# Altium PCB PCB1.PcbDoc
Units mm, origin at the board's own origin, x right, y up, seen from the top; angles counter-clockwise.
Board outline 54.99 x 25.91 mm, 2 copper layers (Top Layer, Bottom Layer); 43 components, 36 nets, 135 pads, 24 vias.
Unrouted connection lines stored in the file: 2.
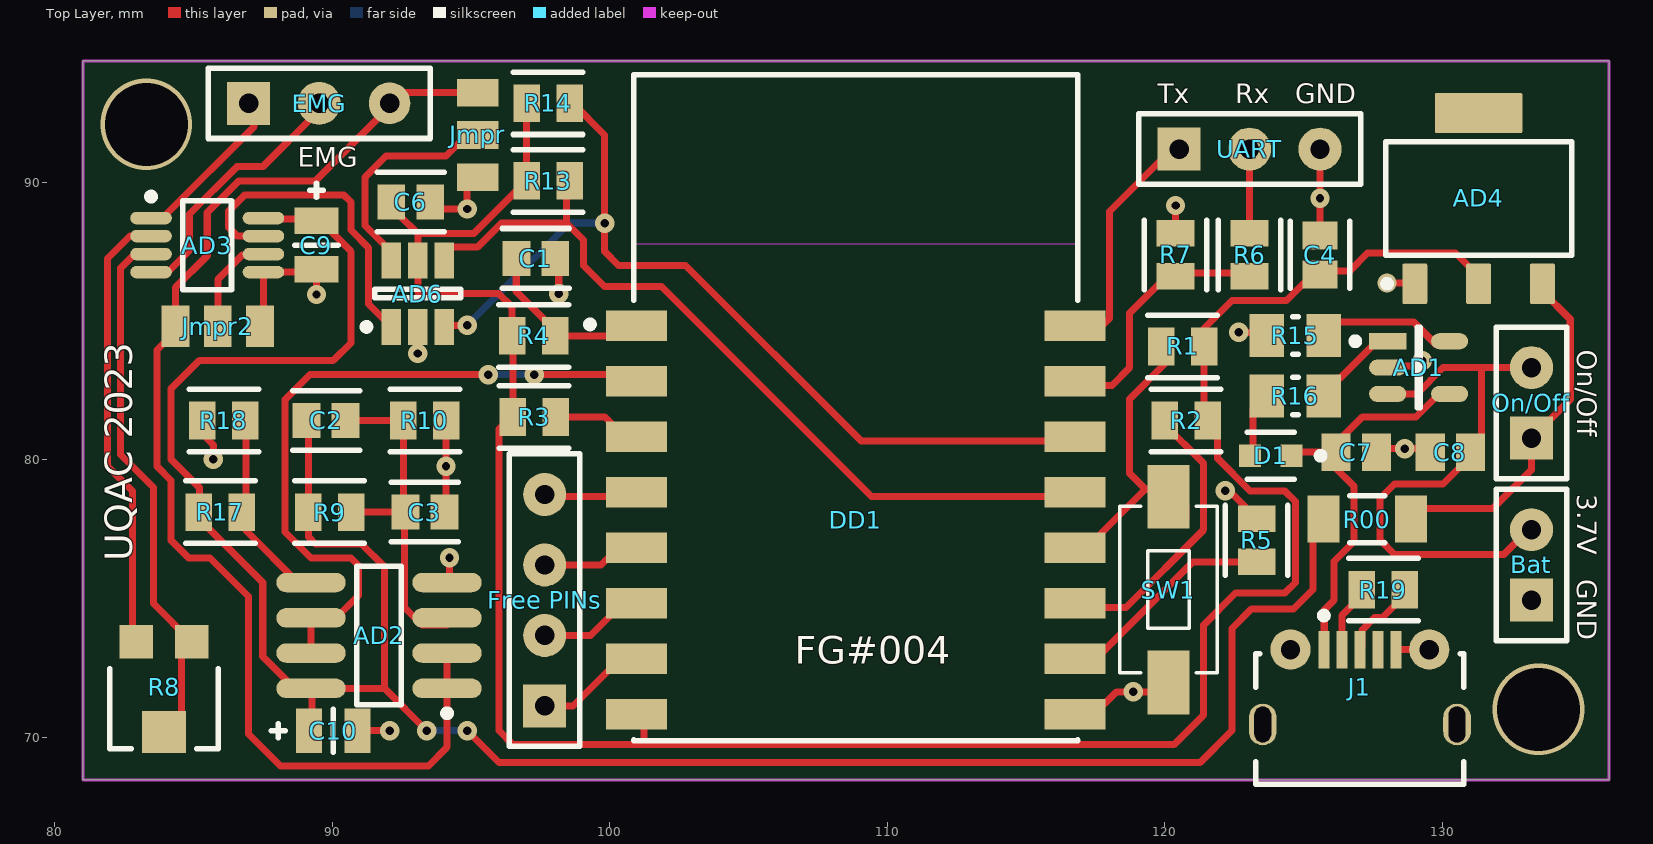
[diagram p0: Top Layer view]
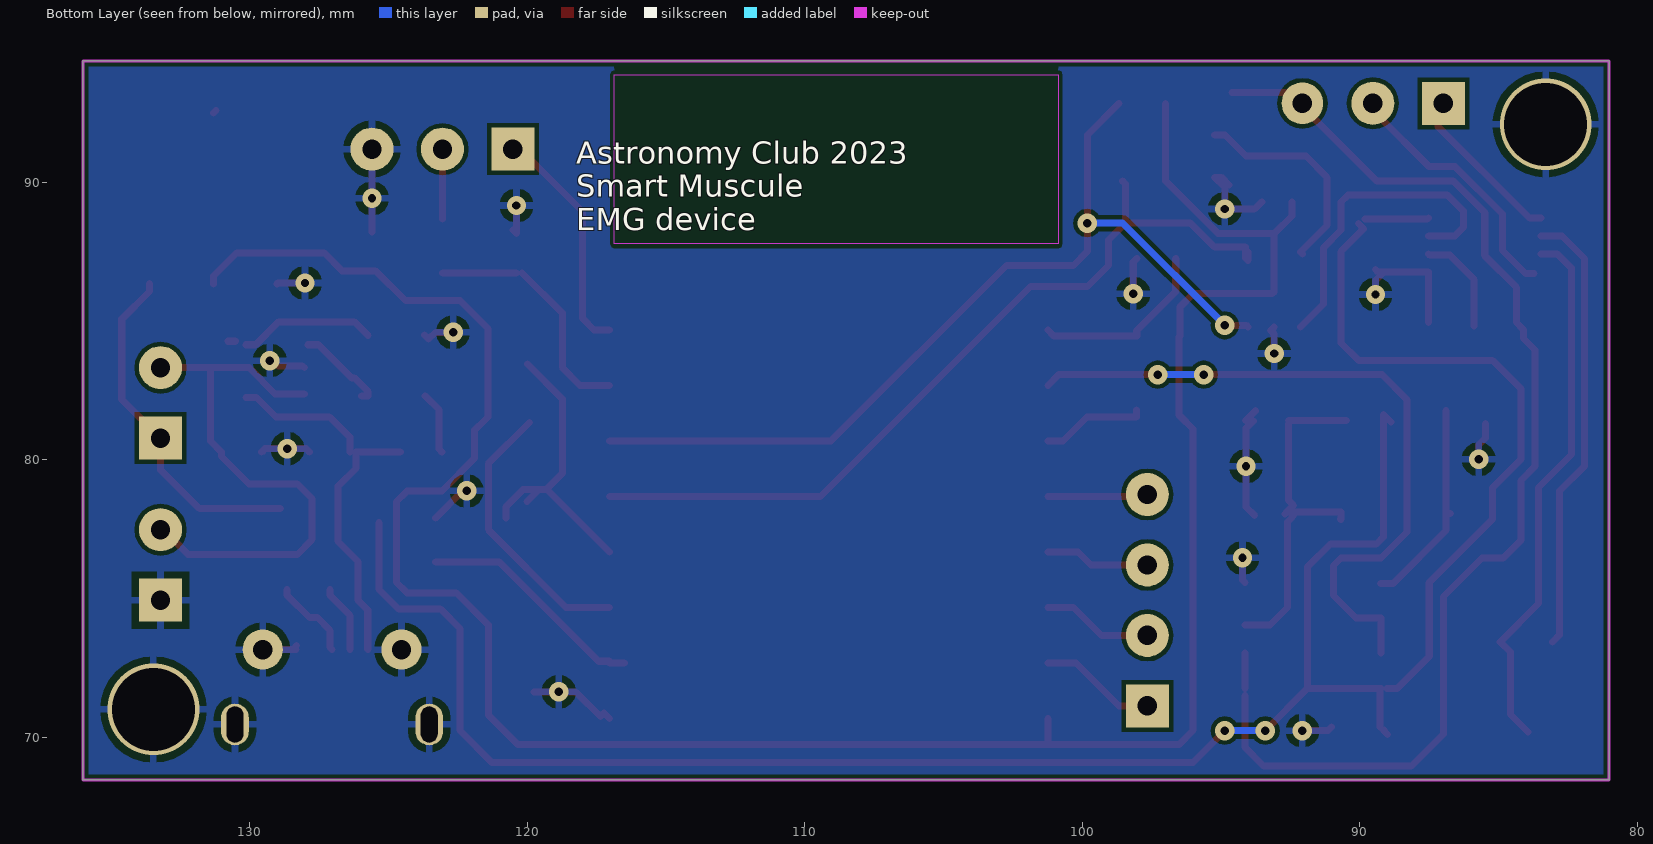
[diagram p1: Bottom Layer view, seen from below]
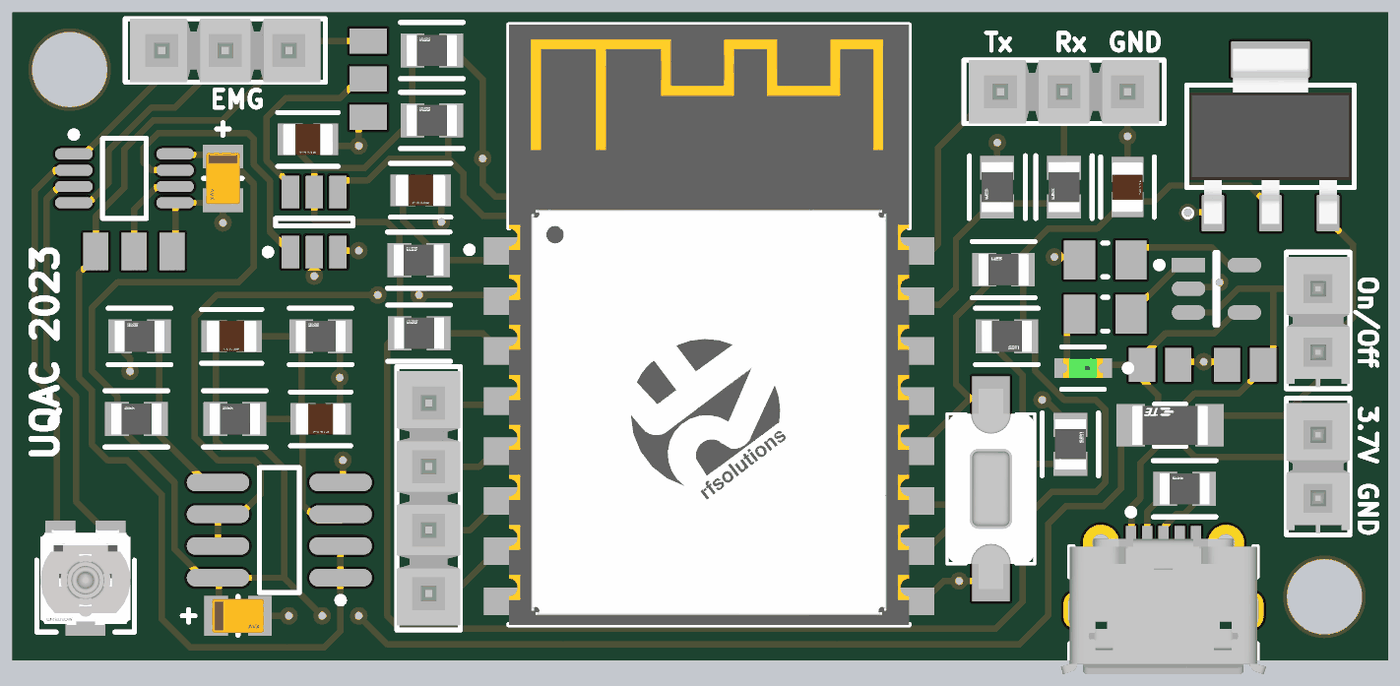
[diagram p2: 3D render of the assembled board from above, using the file's embedded part models]

## Layer stack, top to bottom
Top Solder: solder mask 0.0102, Solder Resist, Dk 3.5
Top Layer: signal copper 0.0356
Dielectric 1: dielectric 0.32, FR-4, Dk 4.8
Bottom Layer: signal copper 0.0356
Bottom Solder: solder mask 0.0102, Solder Resist, Dk 3.5

## Board outline
81.026,68.453 136.017,68.453 136.017,94.361 81.026,94.361

## Design rules (kind name [scope] priority, off if disabled: settings)
Clearance [All] p1: gap=0.152 ignorepadtopadclearanceinfootprint=FALSE
HoleSize [All] p1: absolutevalues=TRUE maxlimit=254 minlimit=0.305 maxpercent=80.000 minpercent=20.000
PolygonConnect [All] p1: connectstyle=Relief reliefconductorwidth=0.254 reliefentries=4 polygonreliefangle="90 Angle" airgapwidth=0.254
RoutingVias [All] p1: holewidth=0.711 width=1.27 viastyle="Through Hole" minholewidth=0.711 minwidth=1.27 maxholewidth=0.711 maxwidth=1.27
SilkToSilkClearance [All] p1: silktosilkclearance=0.025
SilkToSolderMaskClearance [IsPad] p1: minsilkscreentomaskgap=0.025 clearancetoexposedcopper=TRUE
SolderMaskExpansion [All] p1: expansion=0.102
Width [All] p1: maxlimit=0.254 minlimit=0.152 preferedwidth=0.254
27 further rules are at their usual default settings.

## Components (designator, comment, footprint, x,y, rotation, side; value= is the part's Value field where it differs from the comment)
AD1 "MCP73831" FP-C04-091-OT-IPC_B 129.159,83.312 r0 top
AD2 "MCP6002" SOIC-SN8_M 91.694,73.66 r180 top
AD3 "AD8226A" ADI-RM-8_L 85.503,87.725 r0 top
AD4 "LM1117" DCY0004A_L 131.318,89.408 r90 top
AD6 "MCP3421" SOT-23-CH6_M 93.091,85.979 r90 top
Bat "TSW-102-26-G-S" SMTC-TSW-102-26-XX-S 133.223,74.93 r90 top
C1 "0.1uf" FP-0805-L_2_0_0_1-W_1_25-IPC_C 97.342,87.249 r0 top
C2 "10uF" FP-0805-L_2_0_0_1-W_1_25-IPC_C 89.789,81.407 r0 top
C3 "10uF" FP-0805-L_2_0_0_1-W_1_25-IPC_C 93.345,78.105 r0 top
C4 "0.1uf" FP-0805-L_2_0_0_1-W_1_25-IPC_C 125.603,87.376 r90 top
C6 "10uF" FP-0805-L_2_0_0_1-W_1_25-IPC_C 92.837,89.281 r0 top
C7 "4.7uF" CAPC2013X145X50LL20T20 126.91,80.264 r180 top
C8 "4.7uF" CAPC2013X145X50LL20T20 130.302,80.264 r0 top
C9 "22uF" FP-NLJP-MFG 89.44,87.725 r90 top
C10 "22uF" FP-NLJP-MFG 90.043,70.231 r180 top
D1 "LTST-C190GKT" FP-LTST-C190GKT-MFG 123.825,80.137 r180 top
DD1 "ESP-12S" FP-ESP-12S-MFG 108.87,81.868 r0 top
EMG "TSW-103-07-T-S" SMTC-TSW-103-07-X-S#1 86.995,92.837 r0 top
"Free PINs" "TSW-104-08-L-S" SMTC-TSW-104-08-X-S 97.663,71.12 r90 top
J1 "Micro USB" USB-MICRO-B_V 127.04,71.802 r0 top
Jmpr "TSW-103-07-T-S" SMTC-TSW-103-07-X-S#2 95.25,88.646 r90 top
Jmpr2 "TSW-103-07-T-S" SMTC-TSW-103-07-X-S#2 88.932,84.804 r180 top
On/Off "TSW-102-26-G-S" SMTC-TSW-102-26-XX-S 133.223,80.772 r90 top
R00 "0Omh" FP-RP732B-MFG 127.305,77.851 r180 top value=10O
R1 "10K" FP-RG2012-IPC_C 120.65,84.074 r180 top
R2 "10K" FP-RG2012-IPC_C 120.777,81.407 r0 top
R3 "10K" FP-RG2012-IPC_C 97.282,81.534 r180 top
R4 "10K" FP-RG2012-IPC_C 97.268,84.455 r180 top
R5 "10K" FP-RG2012-IPC_C 123.317,77.089 r90 top
R6 "1K" FP-RG2012-IPC_C 123.063,87.376 r270 top
R7 "2K" FP-RG2012-IPC_C 120.396,87.376 r270 top
R8 "10K" FP-TC33X-2-MFG 83.947,71.755 r180 top
R9 "1K" FP-RG2012-IPC_C 89.916,78.105 r180 top
R10 "1K" FP-RG2012-IPC_C 93.345,81.407 r180 top
R13 "2K" FP-RG2012-IPC_C 97.79,90.043 r180 top
R14 "2K" FP-RG2012-IPC_C 97.79,92.837 r180 top
R15 "2K" RESC2013X60X30ML20T20 124.714,84.464 r0 top
R16 "470" RESC2013X60X30ML20T20 124.714,82.296 r0 top
R17 "3K" FP-RG2012-IPC_C 85.979,78.105 r180 top
R18 "1K" FP-RG2012-IPC_C 86.106,81.407 r180 top
R19 "1K" FP-RG2012-IPC_C 127.889,75.311 r180 top
SW1 "Bootloader mode" 434111050826 120.142,75.311 r90 top
UART "TSW-103-07-T-S" SMTC-TSW-103-07-X-S#3 120.523,91.186 r0 top

## Footprints (in the part's own frame and the unit in brackets; to place one, negate y for a bottom-side part, rotate by r counter-clockwise, add the part's x,y. Pads: shape width x height; smd on the part's side, far side on the other; paste and mask are expansions set on the pad)
434111050826 [mm] "6.0*3.5mm vertical type, SMD, height 5.0mm, white actuator, 260gf, T&R"
  rect 2.3x1.5 smd: 1(-3.35,0) 2(3.35,0)
  silkscreen extent -3,-1.75 3,1.75, body extent -4,-1.75 4,1.75, height 5
ADI-RM-8_L [mm] "SOP, 8-Leads, Body 3x3mm, Pitch 0.65mm, IPC High Density"
  oval 1.5x0.45 smd: 1(-2.025,0.975) 2(-2.025,0.325) 3(-2.025,-0.325) 4(-2.025,-0.975) 5(2.025,-0.975) 6(2.025,-0.325) 7(2.025,0.325) 8(2.025,0.975)
  silkscreen extent -2.15,-1.6 0.87,1.87, body extent -1.6,-1.6 1.6,1.6, height 1.1
CAPC2013X145X50LL20T20 [mm] "Chip Capacitor, 2-Leads, Body 2.00x1.25mm, IPC High Density"
  rect 1.05x1.35 smd: 1(-0.725,0) 2(0.725,0)
  body extent -1.1,-0.72 1.1,0.72, height 1.45
DCY0004A_L [mm] "SOT223, 4-Leads, Body 6.7x3.7mm, Pitch 2.3mm, IPC High Density"
  rrect11% 1.45x0.9 smd: 1(-3.075,2.3) 2(-3.075,0) 3(-3.075,-2.3)
  rrect7% 1.45x3.15 smd: 4(3.075,0)
  silkscreen extent -3.2,-3.35 2.05,3.42, body extent -3.5,-3.25 3.5,3.25, height 1.62
FP-0805-L_2_0_0_1-W_1_25-IPC_C [mm]
  rect 1.008x1.262 smd paste+0 mask+0: 1(-0.702,0) 2(0.702,0)
  silkscreen extent -1.21,-1.07 1.21,1.07, body extent -1.31,-0.77 1.31,0.77, height 0.25
FP-C04-091-OT-IPC_B [mm]
  rect 1.338x0.578 smd paste+0 mask+0: 1(-1.116,0.95)
  rrect100% 1.338x0.578 smd paste+0 mask+0: 2(-1.116,0) 3(-1.116,-0.95) 4(1.116,-0.95) 5(1.116,0.95)
  silkscreen extent -2.41,-1.45 0.05,1.45
FP-ESP-12S-MFG [mm]
  rect 2.2x1.1 smd paste+0 mask+0: 1(-7.9,2.95) 2(-7.9,0.95) 3(-7.9,-1.05) 4(-7.9,-3.05) 5(-7.9,-5.05) 6(-7.9,-7.05) 7(-7.9,-9.05) 8(-7.9,-11.05) 9(7.9,-11.05) 10(7.9,-9.05) 11(7.9,-7.05) 12(7.9,-5.05) 13(7.9,-3.05) 14(7.9,-1.05) 15(7.9,0.95) 16(7.9,2.95)
  Keep-Out Layer region: -8,5.9 8,5.9 8,12 -8,12
  Keep-Out Layer region: -8,5.9 8,5.9 8,12 -8,12
  silkscreen extent -9.7,-12 8,12, body extent -9.1,-12.1 9.1,12.1, height 0.25
FP-LTST-C190GKT-MFG [mm]
  rect 0.8x0.8 smd paste+0 mask+0: 1(-0.75,0) 2(0.75,0)
  silkscreen extent -1.92,-0.85 0.85,0.85, body extent -1.25,-0.55 1.25,0.55, height 0.25
FP-NLJP-MFG [mm]
  rect 0.95x1.6 smd paste+0 mask+0: 1(-0.875,0) 2(0.875,0)
  silkscreen extent 0,-0.77 2.22,0.77, body extent -1.45,-0.9 1.45,0.9, height 0.25
FP-RG2012-IPC_C [mm]
  rect 0.955x1.356 smd paste+0 mask+0: 1(-0.776,0) 2(0.776,0)
  silkscreen extent -1.25,-1.12 1.25,1.12, body extent -1.35,-0.82 1.35,0.82, height 0.25
FP-RP732B-MFG [mm]
  rect 1.15x1.7 smd paste+0 mask+0: 1(-1.575,0) 2(1.575,0)
  silkscreen extent -0.63,-0.85 0.63,0.85, body extent -2.25,-0.95 2.25,0.95, height 0.25
FP-TC33X-2-MFG [mm]
  rect 1.2x1.2 smd paste+0 mask+0: 1(-1,-1.675) 3(1,-1.675)
  rect 1.6x1.5 smd paste+0 mask+0: 2(0,1.575)
  silkscreen extent -1.95,-0.7 1.95,2.17, body extent -2.05,-2.37 2.05,2.42, height 0.25
RESC2013X60X30ML20T20 [mm] "Chip Resistor, 2-Leads, Body 2.00x1.25mm, IPC Low Density"
  rect 1.25x1.55 smd: 1(-1.025,0) 2(1.025,0)
  silkscreen extent -0.1,-0.67 0.1,0.67, body extent -1.1,-0.72 1.1,0.72, height 0.6
SMTC-TSW-102-26-XX-S [mm] ".025 SQ Post Terminal Strip Assembly, 1x2 Pins, Vertical, 2.54mm Pitch, Male"
  rect 1.55x1.55 hole 0.7: 1(0,0)
  round 1.55 hole 0.7: 2(2.54,0)
  silkscreen extent -1.46,-1.27 4,1.27, body extent -1.4,-1.27 3.81,1.27, height 8.38
SMTC-TSW-103-07-X-S#1 [mm] ".025 SQ Post Terminal Strip Assembly, 1x3 Pins, Vertical, 2.54mm Pitch, Male"
  rect 1.55x1.55 hole 0.7: 1(0,0)
  round 1.55 hole 0.7: 2(2.54,0)
  round 1.5 hole 0.7: 3(5.08,0)
  silkscreen extent -1.46,-1.27 6.54,1.27, body extent -1.27,-1.27 6.35,1.27, height 8.38
SMTC-TSW-103-07-X-S#2 [mm] ".025 SQ Post Terminal Strip Assembly, 1x3 Pins, Vertical, 2.54mm Pitch, Male"
  rect 1x1.5 smd: 1(4.572,0) 2(3.048,0) 3(1.524,0)
SMTC-TSW-103-07-X-S#3 [mm] ".025 SQ Post Terminal Strip Assembly, 1x3 Pins, Vertical, 2.54mm Pitch, Male"
  rect 1.55x1.55 hole 0.7: 1(0,0)
  round 1.55 hole 0.7: 2(2.54,0) 3(5.08,0)
  silkscreen extent -1.46,-1.27 6.54,1.27, body extent -1.27,-1.27 6.35,1.27, height 8.38
SMTC-TSW-104-08-X-S [mm] ".025 SQ Post Terminal Strip Assembly, 1x4 Pins, Vertical, 2.54mm Pitch, Male"
  rect 1.55x1.55 hole 0.7: 1(0,0)
  round 1.55 hole 0.7: 2(2.54,0) 3(5.08,0) 4(7.62,0)
  silkscreen extent -1.46,-1.27 9.08,1.27, body extent -1.27,-1.27 8.89,1.27, height 8.38
SOIC-SN8_M [mm] "SOIC, 8-Leads, Body 4.9x3.9mm, Pitch 1.27mm, IPC Low Density"
  oval 2.5x0.7 smd: 1(-2.45,1.905) 2(-2.45,0.635) 3(-2.45,-0.635) 4(-2.45,-1.905) 5(2.45,-1.905) 6(2.45,-0.635) 7(2.45,0.635) 8(2.45,1.905)
  silkscreen extent -2.58,-2.5 0.8,2.93, body extent -2,-2.5 2,2.5, height 1.75
SOT-23-CH6_M [mm] "SOT23, 6-Leads, Body 2.9x1.7mm, Pitch 0.95mm, Lead Span 2.8mm, IPC Low Density"
  rect 1.3x0.7 smd: 1(-1.2,0.95) 2(-1.2,0) 3(-1.2,-0.95) 4(1.2,-0.95) 5(1.2,0) 6(1.2,0.95)
  silkscreen extent -1.32,-1.55 0.15,1.97, body extent -0.9,-1.55 0.9,1.55, height 1.45
USB-MICRO-B_V [mm] "USB, MICRO B, Body 7.491x4.695 mm, Pitch 0.65 mm"
  rect 0.4x1.35 smd: 1(-1.3,1.35) 2(-0.65,1.35) 3(0,1.35) 4(0.65,1.35) 5(1.3,1.35)
  round 1.45 hole 0.7: 6(-2.5,1.35) 7(2.5,1.35)
  oval 1x1.5 hole 0.6 slot 1.3 at 90 deg: 8(-3.5,-1.35) 11(3.5,-1.35)
  silkscreen extent -3.75,-3.5 3.75,2.7, body extent -4.1,-3.9 4.1,1.5, height 2.67

## Part data
AD1: library part CMP-0133-00143-2, "IC CONTROLLR LI-ION 4.2V SOT23-5", Case/Package=SOT-23, Drain to Source Resistance=350mR, Max Charge Current=500mA, Max Input Voltage=6V, Max Operating Temperature=85°C, Max Output Voltage=4.5V, Max Power Dissipation=1.54W, Min Operating Temperature=-40°C, Min Output Voltage=4.168V, Min Supply Voltage=3.75V, Output Voltage=4.2V, Voltage Rating=4.534V, Contact Plating=Tin, Height=0.051inch, Lead Free="Lead Free", Length=0.122inch, Max Supply Voltage=6V, Mount="Surface Mount", Number of Cells=1, Number of Channels=1, Number of Outputs=1, Number of Pins=5, Output Current=500mA, Packaging="Tape and Reel", Radiation Hardening=No, REACH SVHC="No SVHC", Termination=SMD/SMT, Weight=0.00709oz, Width=0.071inch
AD2: library part CMP-0187-00365-3, "None", Case/Package=SOIC, Input Bias Current=1pA, Input Offset Voltage (Vos)=4.5mV, Max Operating Temperature=85°C, Max Supply Voltage=6V, Min Operating Temperature=-40°C, Min Supply Voltage=1.8V, Nominal Supply Current=100uA, Operating Supply Voltage=5.5V, Output Current=23mA, Package Quantity=100, Power Supply Rejection Ratio (PSRR)=86dB, Voltage Gain=112dB, Amplifier Type="GENERAL PURPOSE", Bandwidth=1MHz, Common Mode Rejection Ratio=60dB, Gain Bandwidth Product=1MHz, Height=1.25mm, Input Offset Voltage-Max=4.5mV, Lead Free="Lead Free", Length=4.9mm, Mount="Surface Mount", Number of Amplifiers=2, Number of Channels=2, Number of Circuits=2, Number of Elements=2, Number of Pins=8, Packaging=Rail/Tube, Radiation Hardening=No, REACH SVHC="No SVHC", RoHS Compliant=Yes, Slew Rate=0.6V/µs, Slew Rate-Nom=0.6V/µs, Supply Current=100uA, Technology=CMOS, Unity Gain Bandwidth Product=1MHz, Width=3.9mm
AD3: library part CMP-2000-05748-1, "Wide Supply Range, Rail-to-Rail Output Instrumentation Amplifier, 2.2 to 36 V, -40 to 125 degC, 8-Pin MSOP (RM-8), RoHS, Tube", Current - Input Bias=20nA, Current - Output / Channel=13mA, Current - Supply=350µA, Manufacturer="Analog Devices", Operating Temperature=-40°C~125°C, Package / Case="8-TSSOP,8-MSOP(0.118\",3.00mmWidth)", Package Description="8-Pin Mini Small Outline Package, Body 3 x 3 mm, Pitch 0.65 mm", Package Reference=RM-8, Package Version=10/2009, Standard Package=50, Supplier Device Package=8-MSOP, Voltage - Input Offset=100µV, Voltage - Supply, Single/Dual (±)=2.2V~36V,±1.35V~18V, -3db Bandwidth=1.5MHz, Amplifier Type=Instrumentation, Category=IntegratedCircuits(ICs), Datasheet URL=http://www.analog.com/media/en/technical-documentation/data-sheets/AD8226.pdf, Datasheet Version="Rev. C, 09/2012", Design Resources=PLCandDCSUniversalAnalogInputUsingEither4or6-PinTerminalBlock, EDA / CAD Models=DownloadfromAcceleratedDesigns, Family=Linear-Amplifiers-Instrumentation,OPAmps,BufferAmps, Gain Bandwidth Product=-, Manufacturer URL=http://www.analog.com/, Mfg Application Notes=AutomaticExternalDefibrillator(AED)SolutionsElectromagneticFlowMeterSolutionsMotorControlSolution—ServoControlProgrammableLogicControllers(PLCs)SolutionsElectrocardiogram(ECG)Solutions, Mounting Technology=SurfaceMount, Mounting Type=SurfaceMount, Number of Circuits=1, Online Catalog=Instrumentation, Output Type=Rail-to-Rail, Package URL=http://www.analog.com/static/imported-files/packages/PKG_PDF/MSOP%28RM%29/RM_8.pdf, Packaging=Tube, PCN Design/Specification=PolyimideAlignmentTarget11/Aug/2015, Product Training Modules=CommonPhotodiodeOp-AmpCircuitProblemsandSolutionsIndirectCurrentFeedbackInstrumentationAmplifierApplicationsGuide, Series=-, Slew Rate=0.6V/µs
AD4: library part CMP-0062-01639-4, "800mA Low-Dropout Linear Regulator, 4-pin SOT-223, Pb-Free LM1117", Manufacturer="Texas Instruments", PackageTopMarking=XYTT*N05A, PartNumber=LM1117MPX-3.3/NOPB, PowerWise=N, Code_IPC=SOT223-4, Code_JEDEC=TO-261-AA, ComponentLink1Description="Datasheet URL", ComponentLink1URL=http://www.ti.com/general/docs/lit/getliterature.tsp?genericPartNumber=LM1117-N&fileType=pdf, CompType="LDO IC", High-Reliability=Y, PackageDescription="Molded SOT-223, 6.50 x 3.56 x 1.6mm Body, 4 Lead, 2.3mm Pitch", PackageReference=DCY0004A, PinCount=4, RoHS=Y
AD6: library part CMP-0188-00739-2, "18-Bit Analog-to-Digital Converter with I2C Interface and On-Board Reference, 6-Pin SOT-23, Extended Temperature, Tape and Reel", Code_IPC=SOT26A-6, ComponentLink1Description="Manufacturer URL", ComponentLink1URL=http://www.microchip.com/, ComponentLink2Description=Datasheet, ComponentLink2URL=http://ww1.microchip.com/downloads/en/DeviceDoc/22003e.pdf, ComponentLink3Description="Package Specification", ComponentLink3URL=http://www.microchip.com/stellent/groups/techpub_sg/documents/packagingspec/en012702.pdf, DatasheetVersion="revE, Aug-2009", PackageDescription="6-Lead Plastic Small Outline Transistor (CH) [SOT-23]", PackageReference=SOT-23-CH6, PackageVersion="revBB, Aug-2009", RevisionNote="URLs added."
Bat On/Off: library part CMP-1024-00327-1, "0.025\" SQ Post Header, Through-hole, Vertical, -55 to 125 degC, 2.54 mm Pitch, 2-Pin, Male, RoHS", Manufacturer=Samtec, Temperature Range="-55 to 125 degC", ComponentLink1Description="Manufacturer URL", ComponentLink1URL=http://www.samtec.com, ComponentLink2Description=Datasheet, ComponentLink2URL=http://www.samtec.com/documents/webfiles/pdf/TSW_TH.PDF, ComponentLink3Description="Package Specification", ComponentLink3URL=http://www.samtec.com/documents/webfiles/cpdf/TSW-XXX-XX-XXX-X-XX-XXX-MKT.pdf, DatasheetVersion=F-214, Mounting Technology=Through-hole, Orientation=Vertical, PackageDescription=".025[0.64] SQ. Post Terminal Strip Assembly", PackageReference=TSW-102-26-XX-S, PackageVersion="DM, 8/1988", PartNumber=TSW-102-26-G-S, Pitch="2.54 mm", RoHS=True
C1 C3 C4: library part CMP-14477-004636-2, "0.1uF 0805", Capacitance=100nF, Case/Package=0805, Case Code (Metric)=2012, Max Operating Temperature=125°C, Min Operating Temperature=-55°C, Package Quantity=3000, Resistor Type=Ceramic, Tolerance=10%, Voltage=10V, Case Code (Imperial)=0805, Construction=Flat, Depth=1.25mm, Halogen Free="Halogen Free", Height=1.25mm, Lead Free="Lead Free", Length=2mm, Mount="Surface Mount", Number of Pins=2, Packaging="Tape and Reel", Radiation Hardening=No, RoHS Compliant=Yes, Series=CFCAP™, Termination=SMD/SMT, Thickness=0.053inch, Voltage Rating=10V, Voltage Rating (DC)=10V, Weight=0.000194oz, Width=1.25mm
C2 C6: library part CMP-14477-004636-2, "10uF 0805", Capacitance=100nF, Case/Package=0805, Case Code (Metric)=2012, Max Operating Temperature=125°C, Min Operating Temperature=-55°C, Package Quantity=3000, Resistor Type=Ceramic, Tolerance=10%, Voltage=10V, Case Code (Imperial)=0805, Construction=Flat, Depth=1.25mm, Halogen Free="Halogen Free", Height=1.25mm, Lead Free="Lead Free", Length=2mm, Mount="Surface Mount", Number of Pins=2, Packaging="Tape and Reel", Radiation Hardening=No, RoHS Compliant=Yes, Series=CFCAP™, Termination=SMD/SMT, Thickness=0.053inch, Voltage Rating=10V, Voltage Rating (DC)=10V, Weight=0.000194oz, Width=1.25mm
C7 C8: library part CMP-2007-01344-1, "4.7uF 0805", Manufacturer=Vitramon, Part Number=VJ0805A472FXJTW1BC
C9 C10: library part CMP-04425-000003-1, "CAP NIOB OXIDE 22UF 20% 4V 0805", Leakage Current=8.8uA, Manufacturer="AVX Corporation", Manufacturer Part Number=NLJP226M004R4000, Package=NLJP, Ripple Current=134mA, Temperature="-55°C to +105°C", Temperature Coefficient=+25/-20%, Temperature Range High=+105°C, Temperature Range Low=-55°C, Tolerance=20%, Voltage Rating=4V, Automotive=No, Capacitance=22uF, Category=Cap, ComponentLink2Description=Datasheet, ComponentLink2URL=http://datasheets.avx.com/NLJ.pdf, Device Class L1="Passive Components", Device Class L2=Capacitors, Device Class L3="Niobium Oxide", Digikey Description="CAP NIOB OXIDE 22UF 20% 4V 0805", Esr=4000mO, Footprint Url=https://www.avx.com/download/software/literature/AVX-Footprint-Library.pdf, Height=1.5mm, Lead Free=Yes, Life=1000Hours, Material="Niobium Oxide", Mouser Description="Niobium Oxide Capacitors 4volts 22uF 20% ESR=4000mOhms", Octopart=https://octopart.com/nljp226m004r4000-avx-10566975, RoHS=TRUE
D1: library part CMP-22017-000005-2, "LED GREEN CLEAR CHIP SMD", Case/Package=0603, Case Code (Metric)=1608, Color=Green, Forward Current=30mA, Forward Voltage=2.1V, Lens Color=Colorless, Max Operating Temperature=85°C, Min Operating Temperature=-55°C, Package Quantity=1, Power Dissipation=100mW, Reverse Voltage=5V, Test Current=10mA, Voltage=2V, Case Code (Imperial)=0603, Depth=0.8mm, Dominant Wavelength=569nm, Height=0.8mm, Illumination Color=Green, Lead Free="Lead Free", Length=1.6mm, Lens Style=Clear, Lens Transparency=Clear, Luminous Intensity=6mcd, Mount="Surface Mount", Number of Elements=1, Number of LEDs=1, Number of Pins=2, Packaging="Tape and Reel", Power Rating=100mW, Radiation Hardening=No, Viewing Angle=130°, Wavelength=565nm, Width=0.8mm
DD1: library part CMP-204316-000002-1, "RX TXRX MOD WIFI PCB TRACE SMD", Frequency=2.484GHz, Data Rate=54Mbps, Interface=I2C, Sensitivity=-90dBm, Series=-
EMG Jmpr Jmpr2 UART: library part CMP-1024-00332-1, "0.025\" SQ Post Header, Through-hole, Vertical, -55 to 105 degC, 2.54 mm Pitch, 3-Pin, Male, RoHS", Manufacturer=Samtec, Temperature Range="-55 to 105 degC", ComponentLink1Description="Manufacturer URL", ComponentLink1URL=http://www.samtec.com, ComponentLink2Description=Datasheet, ComponentLink2URL=http://www.samtec.com/documents/webfiles/pdf/TSW_TH.PDF, ComponentLink3Description="Package Specification", ComponentLink3URL=http://www.samtec.com/documents/webfiles/cpdf/TSW-XXX-XX-XXX-X-XX-XXX-MKT.pdf, DatasheetVersion=F-214, Mounting Technology=Through-hole, Orientation=Vertical, PackageDescription=".025[0.64] SQ. Post Terminal Strip Assembly", PackageReference=TSW-103-07-X-S, PackageVersion="DM, 8/1988", PartNumber=TSW-103-07-T-S, Pitch="2.54 mm", RoHS=True
"Free PINs": library part CMP-1024-00358-1, "0.025\" SQ Post Header, Through-hole, Vertical, -55 to 125 degC, 2.54 mm Pitch, 4-Pin, Male, RoHS", Manufacturer=Samtec, Temperature Range="-55 to 125 degC", ComponentLink1Description="Manufacturer URL", ComponentLink1URL=http://www.samtec.com, ComponentLink2Description=Datasheet, ComponentLink2URL=http://www.samtec.com/documents/webfiles/pdf/TSW_TH.PDF, ComponentLink3Description="Package Specification", ComponentLink3URL=http://www.samtec.com/documents/webfiles/cpdf/TSW-XXX-XX-XXX-X-XX-XXX-MKT.pdf, DatasheetVersion=F-214, Mounting Technology=Through-hole, Orientation=Vertical, PackageDescription=".025[0.64] SQ. Post Terminal Strip Assembly", PackageReference=TSW-104-08-X-S, PackageVersion="DM, 8/1988", PartNumber=TSW-104-08-L-S, Pitch="2.54 mm", RoHS=True
J1: library part CMP-2000-05827-1, "Micro-USB B Receptacle, Right Angle, Bottom Mount, Surface Mount, with Solder Tabs, -30 to 85 degC, 5-Pin USB, RoHS, Tape and Reel", Manufacturer=Molex, Package Description="5-Leads USB, Micro B, Body 7.5 x 5 mm, Pitch 0.65 mm", Package Reference=MICRO-B, Package Version="Rev. F, 12/2012", Standard Package=1, Voltage - Max=30V, 3D Model=105017-0001.stp, Catalog Drawings=1050170001, Category=Connectors,Interconnects, Circuits=5, Connector Type=USB-microB, Datasheet URL=http://www.molex.com/elqNow/elqRedir.htm?ref=http://www.molex.com/webdocs/datasheets/pdf/en-us/1050170001_IO_CONNECTORS.pdf, Datasheet Version=03/2016, Family=USB,DVI,HDMIConnectors, Featured Product=Micro-USBConnectorsUSBConnectors, Features=Shielded,SolderRetention, Gender=Receptacle, Ingress Protection=-, Manufacturer URL=http://www.molex.com/, Mating Products=WM17145-ND-CABLEMICROUSBBTOSTDA1.0MWM17147-ND-CABLEMICROUSBBTOSTDA2.0MWM17146-ND-CABLEMICROUSBBTOSTDA1.5M, Mounting Technology=SurfaceMount, Mounting Type=BoardCutout,SurfaceMount,RightAngle, Number of Contacts=5, Online Catalog=Molex-MicroUSB, Other Names=WM1399DKR, Package URL=http://www.molex.com/pdm_docs/sd/1050170001_sd.pdf, Packaging=Digi-Reel®, PCN Assembly/Origin=ResinSupplier21/Oct/2015, RoHS Information=1050170001CertofCompliance, Series=-, Specifications=-
R00: library part CMP-03211-009864-1, "1206 0O", Manufacturer="TE Connectivity", Manufacturer Part Number=RP73D2B10RBTG, Package=RP732B, Power Rating=0.25W, Resistance=10O, Temperature="-55°C to 155°C", Temperature Coefficient=15ppm/°C, Temperature Range High=155°C, Temperature Range Low=-55°C, Tolerance=0.1%, Voltage Rating=200V, Automotive=No, Category=Res, ComponentLink2Description=Datasheet, ComponentLink2URL=https://www.te.com/commerce/DocumentDelivery/DDEController?Action=showdoc&DocId=Data+Sheet%7F1773272%7FL%7Fpdf%7FEnglish%7FENG_DS_1773272_L.pdf%7F8-1879255-6, Composition="Thin Film", Device Class L1="Passive Components", Device Class L2=Resistors, Device Class L3="Chip SMD Resistors", Height=0.65mm, Ipc Land Pattern Name=RESC305155X55, Lead Free=Yes, Octopart=https://octopart.com/rp73d2b10rbtg-te+connectivity-42012237, octopart_url=https://octopart.com/rp73d2b10rbtg-te+connectivity-42012237, Packaging="250 cut tape length", RoHS=TRUE, Series=RP73
R1 R2 R3 R4 R5: library part CMP-2001-04803-2, "0805, 10kO", Case/Package=0805, Case Code (Metric)=2012, Max Operating Temperature=155°C, Max Power Dissipation=125mW, Min Operating Temperature=-55°C, Package Quantity=5000, Resistance=10kR, Resistor Type="Thin Film", Temperature Coefficient=10ppm/°C, Tolerance=0.05%, Voltage Rating=150V, Case Code (Imperial)=0805, Features="Automotive AEC-Q200", Height=0.02inch, Lead Free="Lead Free", Length=0.079inch, Number of Terminations=2, Packaging="Tape and Reel", Power Rating=125mW, RoHS Compliant=Yes, Series=RG, Size Code=0805, Termination=SMD/SMT, Voltage Rating (DC)=150V, Weight=0.000194oz, Width=1.2mm
R6 R9 R10 R17 R18 R19: library part CMP-2001-04803-2, "0805, 1kO", Case/Package=0805, Case Code (Metric)=2012, Max Operating Temperature=155°C, Max Power Dissipation=125mW, Min Operating Temperature=-55°C, Package Quantity=5000, Resistance=10kR, Resistor Type="Thin Film", Temperature Coefficient=10ppm/°C, Tolerance=0.05%, Voltage Rating=150V, Case Code (Imperial)=0805, Features="Automotive AEC-Q200", Height=0.02inch, Lead Free="Lead Free", Length=0.079inch, Number of Terminations=2, Packaging="Tape and Reel", Power Rating=125mW, RoHS Compliant=Yes, Series=RG, Size Code=0805, Termination=SMD/SMT, Voltage Rating (DC)=150V, Weight=0.000194oz, Width=1.2mm
R7 R13 R14: library part CMP-2001-04803-2, "0805, 2kO", Case/Package=0805, Case Code (Metric)=2012, Max Operating Temperature=155°C, Max Power Dissipation=125mW, Min Operating Temperature=-55°C, Package Quantity=5000, Resistance=10kR, Resistor Type="Thin Film", Temperature Coefficient=10ppm/°C, Tolerance=0.05%, Voltage Rating=150V, Case Code (Imperial)=0805, Features="Automotive AEC-Q200", Height=0.02inch, Lead Free="Lead Free", Length=0.079inch, Number of Terminations=2, Packaging="Tape and Reel", Power Rating=125mW, RoHS Compliant=Yes, Series=RG, Size Code=0805, Termination=SMD/SMT, Voltage Rating (DC)=150V, Weight=0.000194oz, Width=1.2mm
R8: library part CMP-07234-000040-1, "0-10K", Color=Silver, Max Operating Temperature=100°C, Max Power Dissipation=100mW, Min Operating Temperature=-40°C, Package Quantity=2500, Resistance=100kR, Resistance Tolerance=25%, Resistor Type=Carbon, Temperature Coefficient=250ppm/°C, Voltage Rating (DC)=50V, Depth=3.8mm, Height=0.047inch, Length=3mm, Military Standard=Not, Mount="Surface Mount", Number of Turns=1, Packaging="Tape and Reel", Power Rating=100mW, Radiation Hardening=No, REACH SVHC="No SVHC", RoHS Compliant=Yes, Series=TC33, Termination="Foot Print", Tolerance=25%, Weight=29.4mg, Width=0.118inch
R15: library part CMP-2001-04656-1, "0805, 2KO", Manufacturer="KOA Speer", Part Number=RK73B2ATTD102J
R16: library part CMP-2001-04656-1, "0805, 470O", Manufacturer="KOA Speer", Part Number=RK73B2ATTD102J
SW1: library part CMP-1459-00003-1, "WS-TASV SMD Tact Switch 6.0X3.5 mm", Manufacturer="Wuerth Elektronik", PartNumber=434111050826, ComponentLink1Description="Manufacturer URL", ComponentLink1URL=http://www.we-online.com, ComponentLink2Description=Datasheet, ComponentLink2URL=http://katalog.we-online.de/em/datasheet/434111050826.pdf, NoPins=02, PackageReference=434111050826

## Via types
v1: diameter 0.7, hole 0.305, Top Layer to Bottom Layer, tented both sides, 22 vias
v2: diameter 3.3, hole 3, Top Layer to Bottom Layer, tented both sides, 2 vias

## Nets (pads, with @x,y where several pads share a name; then routed paths per layer and width w, separated by ;. In a path a pad name is that pad's centre, name@x,y a point inside that pad or via, vN(x,y) a via of type N, cw(c..) or ccw(c..) an arc to the next point about the centre after c; other vN are vias at no path point)
GND: AD1.2 AD2.4 AD3.5 AD4.1 AD6.2 Bat.1 C1.2 C3.2 C4.2 C6.2 C7.1 C8.1 C9.1 C10.1 DD1.9 J1.5 J1.6 J1.7 J1.8 J1.11 Jmpr2.3 Jmpr.3 R5.2 R7.1 R10.1 R15.1 R18.2 SW1.1 UART.3 | length 34
  Top Layer w0.254: R18.2@85.471,81.29 85.471,80.782 85.725,80.528 v1(85.725,80.01) ; Jmpr2.3@87.535,84.947 87.535,86.743 AD3.5 89.34,86.75 C9.1 ; C9.1@89.186,86.709 89.44,86.455 v1(89.44,85.947) ; C10.1@91.031,70.358 91.158,70.231 v1(92.075,70.231) ; v1(93.091,83.82) 93.091,84.525 93.218,84.652 AD6.2 ; C6.2 93.793,89.027 v1(94.869,89.027) 94.869,89.797 Jmpr.3@95.242,90.17 ; R10.1@93.77,81.757 R10.1 ; C3.2@93.793,77.978 94.107,78.292 v1(94.107,79.756) 94.107,81.127 93.847,81.387 R10.1@93.867,81.407 ; AD2.4 94.234,75.655 v1(94.234,76.454) ; Jmpr.3@94.722,89.892 95,90.17 Jmpr.3@95.242,90.17 ; Jmpr.3 Jmpr.3@95.242,90.17 ; C1.2 98.171,87.122 v1(98.171,85.979) ; DD1.9@117.047,70.668 117.245,70.866 117.372,70.739 118.261,71.628 v1(118.872,71.628) SW1.1@119.761,71.628 ; v1(120.396,89.154) R7.1 R7.1@120.523,88.279 ; v1(122.191,78.867) 122.335,78.867 R5.2@123.317,77.885 ; v1(122.682,84.582) 123.317,84.582 123.562,84.337 R15.1 R15.1@123.707,84.482 ; C4.2@125.603,88.205 v1(125.603,89.408) UART.3 ; C7.1@127.852,80.264 127.979,80.391 v1(128.651,80.391) 129.45,80.391 C8.1 ; v1(128.016,86.36) 128.991,86.36 AD4.1 ; AD1.2 128.105,83.374 128.973,83.374 129.165,83.566 v1(129.286,83.566) ; J1.5@128.325,73.294 J1.5@128.34,73.279 ; J1.5 J1.7 ; 131.218,92.583 131.318,92.483 ; Bat.1@132.969,74.676 Bat.1
  other v2: 133.477,70.993 83.312,92.075
NetAD1_1: AD1.1 R16.2 | length 3.3
  Top Layer w0.254: R16.2@125.984,82.296 R16.2 125.739,82.446 126.237,82.944 126.345,82.944 127.536,84.135 AD1.1@127.916,84.135
NetAD1_3: AD1.3 Bat.2 C8.2 On/Off.2 | length 20.4
  Top Layer w0.254: AD1.3 129.091,82.362 130.041,83.312 131.445,83.312 ; On/Off.2 131.445,83.312 ; Bat.2@133.236,77.483 Bat.2 133.112,77.47 132.223,76.581 128.292,76.581 127.762,77.111 127.762,78.591 128.292,79.121 130.034,79.121 131.027,80.114 C8.2 131.425,80.662 131.425,83.292 131.445,83.312
NetAD1_4: AD1.4 C7.2 D1.1 J1.1 | length 14.3
  Top Layer w0.254: D1.1@124.575,80.264 C7.2 126.185,79.682 126.831,79.036 126.831,77.047 126.111,76.327 126.111,74.93 125.755,74.574 125.755,73.167 J1.1 ; C7.2@126.402,80.264 126.402,80.809 127.127,81.534 129.067,81.534 129.768,82.235 AD1.4@130.148,82.235
NetAD1_5: AD1.5 R15.2 | length 5.2
  Top Layer w0.254: R15.2 126.238,84.963 128.965,84.963 129.793,84.135 AD1.5@130.148,84.135 ; AD1.5@130.529,84.262 AD1.5@130.783,84.262
NetAD2_1: AD2.1 AD2.2 EMG.3 Jmpr2.1 Jmpr.1 | length 44
  Top Layer w0.254: AD2.1@94.144,71.501 94.144,69.633 93.472,68.961 88.138,68.961 86.995,70.104 86.995,75.057 85.598,76.454 84.836,76.454 84.201,77.089 84.201,79.248 83.693,79.756 83.693,83.947 84.106,84.36 84.106,84.677 84.36,84.931 84.362,86.206 85.503,87.344 85.503,88.902 86.644,90.043 89.408,90.043 92.075,92.71 EMG.3 92.075,92.964 91.821,93.218 Jmpr.1@94.615,93.218 ; AD2.1 AD2.2
NetAD2_3: AD2.3 C2.2 C3.1 R9.1 R10.2 | length 12.9
  Top Layer w0.254: C2.2 R10.2 ; R9.1@90.705,77.851 90.692,77.837 R9.1 C3.1@92.389,78.105 ; C3.1@92.389,77.978 C3.1@92.389,78.105 ; C3.1@92.397,78.351 92.583,78.537 R10.2@92.583,81.288 ; C3.1@92.452,77.914 92.615,77.752 92.615,74.67 93.244,74.041 AD2.3@94.144,74.041 ; C3.1@92.479,78.269 C3.1@92.643,78.105 ; C3.1@92.706,78.041 C3.1 ; C3.1@92.389,78.105 C3.1@92.643,78.105
NetAD2_5: AD2.5 R17.1 R18.1 | length 7.5
  Top Layer w0.254: R17.1@86.741,78.051 R17.1@86.768,78.078 ; R18.1@86.895,81.761 86.895,77.443 88.8,75.538 AD2.5@89.254,75.538
NetAD2_6: AD2.6 AD2.7 DD1.2 | length 25.8
  Top Layer w0.254: AD2.7 AD2.6 90.144,74.295 90.954,75.105 90.954,76.178 90.678,76.454 89.241,76.454 88.304,77.391 88.304,82.154 89.208,83.058 v1(95.631,83.058) ; v1(97.282,83.058) 100.857,83.058 DD1.2@101.247,82.668
  Bottom Layer w0.254: v1(95.631,83.058) v1(97.282,83.058)
NetAD2_8: AD2.8 AD3.8 C2.1 C9.2 C10.2 R00.2 R9.2 R17.2 | length 85.7
  Top Layer w0.254: AD3.8 87.565,88.663 C9.2@89.821,88.663 ; C2.1@88.886,81.353 89.154,81.621 89.154,78.105 89.154,77.216 89.408,76.962 91.059,76.962 91.885,76.136 91.885,71.755 ; C10.2@89.013,70.09 89.154,70.231 C10.2@89.14,70.245 ; AD2.8@89.027,71.755 88.646,71.755 87.503,72.898 87.503,75.565 85.217,77.851 85.217,78.994 84.201,80.01 84.201,82.55 85.217,83.566 90.043,83.566 90.678,84.201 90.678,87.503 89.867,88.314 C9.2@90.057,88.505 ; C10.2@89.281,70.358 89.281,71.718 AD2.8 91.885,71.755 ; v1@93.409,70.421 v1(93.409,70.231) 91.885,71.755 ; v1(94.869,70.231) 96.012,69.088 121.285,69.088 122.428,70.231 122.428,73.914 123.127,74.613 124.651,74.613 125.349,75.311 R00.2@125.349,77.724
  Bottom Layer w0.254: v1(93.409,70.231) v1(94.869,70.231)
NetAD3_1: AD3.1 EMG.1 | length 6
  Top Layer w0.254: AD3.1 83.894,88.7 83.985,88.791 87.196,92.001 87.196,92.636 EMG.1
NetAD3_2: AD3.2 R8.3 | length 16.2
  Top Layer w0.254: R8.3@83.058,73.43 82.804,73.684 82.804,78.867 81.915,79.756 81.915,87.249 82.716,88.05 AD3.2
NetAD3_3: AD3.3 R8.1 R8.2 | length 19.5
  Top Layer w0.254: AD3.3 82.89,87.4 82.384,86.894 82.384,80.176 83.566,78.994 83.566,74.811 R8.1 84.582,73.065 84.582,70.815 R8.2
NetAD3_4: AD3.4 EMG.2 | length 9.4
  Top Layer w0.254: AD3.4@83.725,86.709 84.042,86.709 84.868,87.535 84.868,88.842 86.577,90.551 87.503,90.551 89.344,92.392 EMG.2@88.9,92.837
NetAD3_6: AD3.6 Jmpr2.2 | length 3.7
  Top Layer w0.254: Jmpr2.2 85.884,86.488 86.758,87.363 87.49,87.363 AD3.6
NetAD3_7: AD3.7 AD6.1 | length 11.8
  Top Layer w0.254: AD3.7 86.585,88.05 86.265,88.37 86.265,88.946 86.854,89.535 90.424,89.535 90.678,89.281 90.678,88.265 91.313,87.63 91.313,85.607 AD6.1
NetAD4_2: AD4.2 AD4.4 AD6.5 C4.1 C6.1 DD1.8 R1.1 R2.2 R3.2 R4.2 R13.2 R14.2 | length 87.2
  Top Layer w0.254: C6.1@92.449,89.281 92.449,88.78 93.091,88.138 ; R14.2 R13.2 95.109,88.138 93.091,88.138 ; DD1.8@101.247,70.668 101.247,69.723 ; AD4.2 131.318,86.608 130.487,87.439 127.317,87.439 126.679,86.801 125.476,86.801 124.4,85.725 122.428,85.725 121.426,84.723 R1.1 121.426,81.534 R2.2 121.903,81.057 121.903,80.045 123.081,78.867 124.334,78.867 124.714,78.487 124.714,75.565 124.333,75.184 122.555,75.184 121.412,74.041 121.412,70.792 120.343,69.723 101.247,69.723 ; 93.091,88.138 AD6.5 93.091,86.038 93.15,85.979 96.002,85.979 96.493,85.489 R4.2 96.514,84.433 96.514,81.595 96.012,81.093 96.012,70.231 96.52,69.723 101.247,69.723
NetAD4_3: AD4.3 On/Off.1 R00.1 | length 12.6
  Top Layer w0.254: R00.1@128.905,78.232 131.826,78.232 133.223,79.629 On/Off.1 134.62,82.169 134.62,85.056 133.618,86.058 AD4.3
NetAD6_3: AD6.3 DD1.14 R14.1 | length 33.2
  Top Layer w0.254: AD6.3 94.098,84.836 v1(94.869,84.836) ; R14.1@98.679,92.837 99.822,91.694 v1(99.822,88.519) 99.822,87.503 100.33,86.995 102.743,86.995 109.07,80.668 DD1.14@117.047,80.668
  Bottom Layer w0.254: v1(94.869,84.836) 98.552,88.519 v1(99.822,88.519)
NetAD6_4: AD6.4 DD1.13 R13.1 | length 30.3
  Top Layer w0.254: AD6.4@94.041,87.479 AD6.4 94.131,87.269 94.131,87.654 95.25,87.654 96.115,88.519 98.044,88.519 ; 98.058,88.519 98.448,88.519 ; R13.1 98.448,89.925 98.448,88.519 ; DD1.13@117.047,78.668 109.436,78.668 101.871,86.233 99.822,86.233 99.06,86.995 99.06,87.907 98.448,88.519
NetAD6_6: AD6.6 Jmpr.2 | length 7.9
  Top Layer w0.254: AD6.6@92.075,87.413 92.141,87.479 91.186,88.434 91.186,90.17 91.948,90.932 94.107,90.932 94.869,91.694 Jmpr.2
NetC1_1: C1.1 DD1.1 R4.1 | length 6.7
  Top Layer w0.254: C1.1 96.64,86.06 98.044,84.656 R4.1 101.034,84.455 DD1.1@101.247,84.668
NetD1_2: D1.2 R16.1 | length 2.3
  Top Layer w0.254: D1.2@123.075,80.264 123.191,80.38 123.191,81.798 R16.1
NetDD1_3: DD1.3 R3.1 | length 3.8
  Top Layer w0.254: R3.1@98.058,81.788 R3.1 99.831,81.534 100.697,80.668 DD1.3@101.247,80.668
NetDD1_4: "Free PINs.4" DD1.4 | length 3.9
  Top Layer w0.254: 97.409,78.486 97.591,78.668 DD1.4@101.247,78.668
NetDD1_5: "Free PINs.3" DD1.5 | length 4.1
  Top Layer w0.254: 97.409,75.946 97.663,76.2 99.695,76.2 100.163,76.668 DD1.5@101.247,76.668
NetDD1_6: "Free PINs.2" DD1.6 | length 4.4
  Top Layer w0.254: 97.409,73.406 97.663,73.66 99.314,73.66 100.322,74.668 DD1.6@101.247,74.668
NetDD1_7: "Free PINs.1" DD1.7 | length 4.6
  Top Layer w0.254: 97.409,70.866 97.663,71.12 98.679,71.12 100.227,72.668 DD1.7@101.247,72.668
NetDD1_10: DD1.10 R5.1 | length 8.4
  Top Layer w0.254: DD1.10@116.497,72.668 117.047,72.668 117.047,72.73 117.434,72.73 121.017,76.313 R5.1
NetDD1_11: DD1.11 R2.1 | length 10
  Top Layer w0.254: DD1.11@117.047,74.668 118.61,74.668 121.412,77.47 121.412,79.853 R2.1@119.93,81.335
NetDD1_12: DD1.12 R1.2 SW1.2 | length 11.2
  Top Layer w0.254: DD1.12@117.047,76.668 119.301,78.922 119.325,78.922 ; R1.2@120.001,83.439 118.745,82.183 118.745,79.502 119.325,78.922 ; SW1.2@120.015,78.486 SW1.2@119.579,78.922 ; SW1.2@120.777,77.899 120.777,78.299 120.154,78.922 SW1.2@119.579,78.922 ; 119.325,78.922 SW1.2@119.579,78.922
NetDD1_15: DD1.15 R6.2 R7.2 | length 8.6
  Top Layer w0.254: DD1.15@117.047,82.668 118.101,82.668 118.745,83.312 118.745,85.277 R7.2@120.195,86.727 ; R7.2@120.396,86.727 R6.2@123.063,86.727
NetDD1_16: DD1.16 UART.1 | length 8.4
  Top Layer w0.254: DD1.16@117.047,84.668 117.597,84.668 118.02,85.091 118.02,88.937 120.269,91.186 UART.1
NetJ1_2: J1.2 R19.2 | length 2.5
  Top Layer w0.254: J1.2 126.39,74.387 127.113,75.11 R19.2
NetJ1_3: J1.3 R19.1 | length 3
  Top Layer w0.254: J1.3 127.113,73.225 127.113,73.845 127.57,74.303 127.857,74.303 128.665,75.11 R19.1
NetR6_1: R6.1 UART.2 | length 2.5
  Top Layer w0.254: 123.063,88.66 UART.2
pads on no net: J1.4

## Polygon pours and split planes (outlines as drawn)
GND on Bottom Layer "Bottom Layer-GND 1" (solid, pour order 72): 81.026,94.361 136.017,94.361 136.017,68.453 81.026,68.453
GND on Bottom Layer "Bottom Layer-GND" (solid, pour order 58): 79.248,94.615
no net on Bottom Layer "Bottom Layer-No Net" (solid, pour order 56): 79.248,94.361
GND on Bottom Layer "Bottom Layer-GND 2" (solid, pour order 14): 136.271,94.234
GND on Bottom Layer "Bottom Layer-GND 3" (solid, pour order 8): 103.251,79.883
GND on Bottom Layer "Bottom Layer-GND 4" (solid, pour order 2): 107.569,80.518

## Keep-outs
Keep-Out Layer:
  the board outline again, w0.1

## Silkscreen, mask and mechanical layers (free items; w line width, h text height)
Top Overlay:
  text "Tx" at 119.761,92.837 h0.7
  text "Rx" at 122.555,92.837 h0.7
  text "GND" at 124.714,92.837 h0.7
  text "EMG" at 88.773,90.551 h0.7
  text "On/Off" at 134.874,83.947 h0.7 r270
  text "3.7V" at 134.874,78.74 h0.7 r270
  text "UQAC 2023" at 82.804,76.327 h1 r90
  text "GND" at 134.874,75.692 h0.7 r270
  text "FG#004" at 106.68,72.644 h1
Bottom Overlay:
  text "Astronomy Club 2023 / Smart Muscule / EMG device" at 118.237,88.265 h0.8

## Text inside footprints (layer, text, board x,y; h text height)
J1: Mechanical 1 "PCB EDGE" at 119.84,68.902 h0.3